# EAGLE board SparkFun_SOIC8-DIP-Adapter-Dimensions (EAGLE 7.3.0)
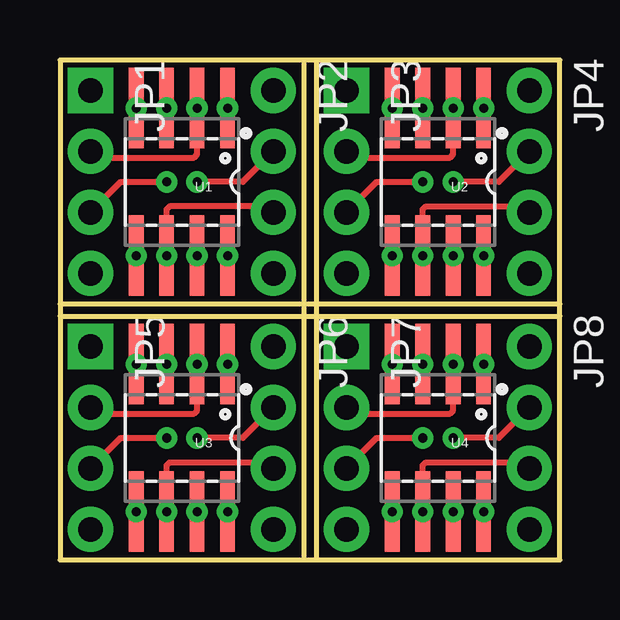
[diagram p0: board, top side]
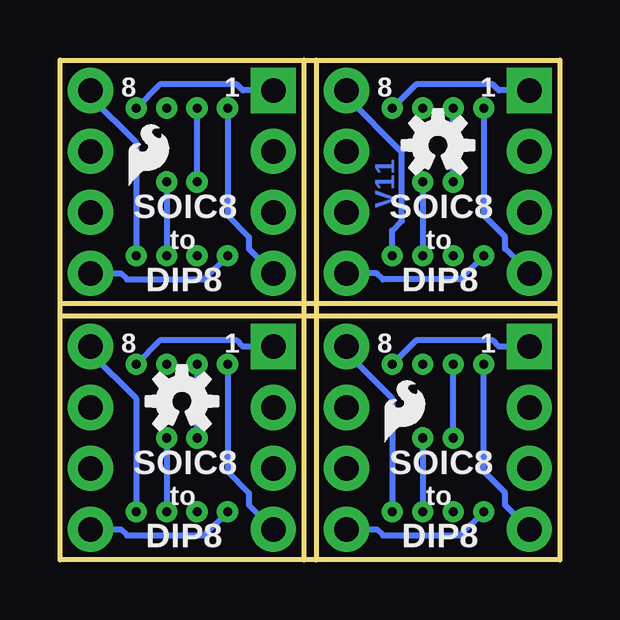
[diagram p1: board, bottom side, seen from below]

Size 20.83 x 20.83 mm. Coordinates in mm from the lower left corner, seen from the top.
Outline: 10.67,0 0,0 0,10.67
Outline: 20.83,10.67 20.83,0 10.67,0
Outline: 20.83,10.67 20.83,20.83 10.67,20.83
Outline: 10.67,20.83 0,20.83 0,10.67
Outline: 0,10.16 20.83,10.16
Outline: 10.16,20.83 10.16,0
Outline: 10.67,20.83 10.67,0
Outline: 0,10.67 20.83,10.67
Copper layers (1*16): Top 0.035mm / dielectric 1.5mm / Bottom 0.035mm
Design rules "SparkFun-2-layer *": minimum track width 7mil, minimum drill 15mil, track to track 8mil, track to pad 8mil, pad to pad 8mil, via to via 8mil, smd to smd 8mil, copper to edge 8mil, drill to drill 8mil, minimum pad ring 12mil, minimum via ring 10mil, stop-mask expansion 4mil, vias tented up to drill 20mil, thermal gap 10mil

## Footprints (pad centres in the part's own frame; a part is rotated, then mirrored left to right if it is on the bottom)
1X04_NO_SILK = drill 1.016 pad 1.88 square: 1 0,0 | drill 1.016 pad 1.88: 2 2.54,0; 3 5.08,0; 4 7.62,0
1X04_NO_SILK_ALL_ROUND = drill 1.016 pad 1.88: 1 0,0; 2 2.54,0; 3 5.08,0; 4 7.62,0
SO08-UNIVERSAL = smd 0.61 x 3.353: 1 -1.905,-3.073; 2 -0.635,-3.073; 3 0.635,-3.073; 4 1.905,-3.073; 5 1.905,3.073; 6 0.635,3.073; 7 -0.635,3.073; 8 -1.905,3.073

## Placement (x,y rotation side)
FRAME1  frame  [CREATIVE_COMMONS]  -15.24,-27.94 0 top  (outside the outline)
JP1  1x4  [1X04_NO_SILK]  1.27,19.56 270 top
JP2  1x4  [1X04_NO_SILK_ALL_ROUND]  8.89,19.56 270 top
JP3  1x4  [1X04_NO_SILK]  11.94,19.56 270 top
JP4  1x4  [1X04_NO_SILK_ALL_ROUND]  19.56,19.56 270 top
JP5  1x4  [1X04_NO_SILK]  1.27,8.89 270 top
JP6  1x4  [1X04_NO_SILK_ALL_ROUND]  8.89,8.89 270 top
JP7  1x4  [1X04_NO_SILK]  11.94,8.89 270 top
JP8  1x4  [1X04_NO_SILK_ALL_ROUND]  19.56,8.89 270 top
LOGO1  SFE_LOGO_FLAME.1_INCH  [SFE_LOGO_FLAME_.1]  18.29,15.24 0 bottom
LOGO2  OSHW-LOGOS  [OSHW-LOGO-S]  5.08,17.27 0 bottom
LOGO3  OSHW-LOGOS  [OSHW-LOGO-S]  15.75,6.6 0 bottom
LOGO4  SFE_LOGO_FLAME.1_INCH  [SFE_LOGO_FLAME_.1@1]  7.62,4.57 0 bottom
U1  GENERIC-SOIC8  [SO08-UNIVERSAL]  5.08,15.75 180 top
U2  GENERIC-SOIC8  [SO08-UNIVERSAL]  15.75,15.75 180 top
U3  GENERIC-SOIC8  [SO08-UNIVERSAL]  5.08,5.08 180 top
U4  GENERIC-SOIC8  [SO08-UNIVERSAL]  15.75,5.08 180 top

## Library data of the parts
FRAME1 LOGO1-LOGO4 = SparkFun-Aesthetics
JP1-JP8 = SparkFun-Connectors
U1-U4 = SparkFun-AnalogIC

## Nets
N$1: JP1.1 U1.1
N$2: JP1.2 U1.2
N$3: JP1.3 U1.3
N$4: JP1.4 U1.4
N$5: JP2.1 U1.8
N$6: JP2.2 U1.7
N$7: JP2.3 U1.6
N$8: JP2.4 U1.5
N$9: JP3.1 U2.1
N$10: JP3.2 U2.2
N$11: JP3.3 U2.3
N$12: JP3.4 U2.4
N$13: JP4.1 U2.8
N$14: JP4.2 U2.7
N$15: JP4.3 U2.6
N$16: JP4.4 U2.5
N$17: JP5.1 U3.1
N$18: JP5.2 U3.2
N$19: JP5.3 U3.3
N$20: JP5.4 U3.4
N$21: JP6.4 U3.5
N$22: JP6.3 U3.6
N$23: JP6.2 U3.7
N$24: JP6.1 U3.8
N$25: JP7.1 U4.1
N$26: JP7.2 U4.2
N$27: JP7.3 U4.3
N$28: JP7.4 U4.4
N$29: JP8.1 U4.8
N$30: JP8.2 U4.7
N$31: JP8.3 U4.6
N$32: JP8.4 U4.5

## Tracks (layer width: path | path; a pad name or v marks a point on that pad's centre or on a via)
N$1  (via drill 0.38)
  Bottom 0.254: U1.1 5.99,19.81 2.79,19.81 2.54,19.56 JP1.1
  other vias: 6.99,18.82
N$2  (via drill 0.38)
  Top 0.254: JP1.2 1.52,16.76 5.59,16.76 5.71,16.89 U1.2
  other vias: 5.71,18.82
N$3  (via drill 0.38)
  Top 0.254: JP1.3 2.54,15.75 v4.45,15.75
  Bottom 0.254: v4.45,15.75 U1.3
  other vias: 4.45,18.82
N$4  (via drill 0.38)
  Bottom 0.254: JP1.4 2.29,12.95 2.29,13.46 3.17,14.35 U1.4
  other vias: 3.17,18.82
N$5  (via drill 0.38)
  Top 0.254: U1.8 6.99,12.06 7.11,11.94
  Bottom 0.254: JP2.1 8.89,19.3 6.58,16.99 6.58,14.12 6.99,13.72 U1.8
  other vias: 6.99,12.67
N$6  (via drill 0.38)
  Top 0.254: v5.71,15.75 7.62,15.75 JP2.2
  Bottom 0.254: v5.71,15.75 U1.7
  other vias: 5.71,12.67
N$7  (via drill 0.38)
  Top 0.254: U1.6 4.45,14.61 4.57,14.73 8.64,14.73 JP2.3
  other vias: 4.45,12.67
N$8  (via drill 0.38)
  Bottom 0.254: JP2.4 7.62,11.94 7.37,11.68 4.17,11.68 U1.5
  other vias: 3.17,12.67
N$9  (via drill 0.38)
  Bottom 0.254: JP3.1 13.21,19.56 13.46,19.81 16.66,19.81 U2.1
  other vias: 17.65,18.82
N$10  (via drill 0.38)
  Top 0.254: JP3.2 12.19,16.76 16.26,16.76 16.38,16.89 U2.2
  other vias: 16.38,18.82
N$11  (via drill 0.38)
  Top 0.254: JP3.3 13.21,15.75 v15.11,15.75
  Bottom 0.254: v15.11,15.75 U2.3
  other vias: 15.11,18.82
N$12  (via drill 0.38)
  Bottom 0.254: U2.4 13.84,14.35 12.95,13.46 12.95,12.95 JP3.4
  other vias: 13.84,18.82
N$13  (via drill 0.38)
  Bottom 0.254: JP4.1 19.56,19.3 17.65,17.4 U2.8
  other vias: 17.65,12.67
N$14  (via drill 0.38)
  Top 0.254: JP4.2 18.29,15.75 v16.38,15.75
  Bottom 0.254: v16.38,15.75 U2.7
  other vias: 16.38,12.67
N$15  (via drill 0.38)
  Top 0.254: U2.6 15.11,14.61 15.24,14.73 19.3,14.73 JP4.3
  other vias: 15.11,12.67
N$16  (via drill 0.38)
  Bottom 0.254: JP4.4 18.29,11.94 18.03,11.68 14.83,11.68 U2.5
  other vias: 13.84,12.67
N$17  (via drill 0.38)
  Bottom 0.254: JP5.1 2.54,8.89 2.79,9.14 5.99,9.14 U3.1
  other vias: 6.99,8.15
N$18  (via drill 0.38)
  Top 0.254: JP5.2 1.52,6.1 5.59,6.1 5.71,6.22 U3.2
  other vias: 5.71,8.15
N$19  (via drill 0.38)
  Top 0.254: JP5.3 2.54,5.08 v4.45,5.08
  Bottom 0.254: v4.45,5.08 U3.3
  other vias: 4.45,8.15
N$20  (via drill 0.38)
  Bottom 0.254: JP5.4 2.29,2.29 2.29,2.79 3.17,3.68 U3.4
  other vias: 3.17,8.15
N$21  (via drill 0.38)
  Bottom 0.254: JP6.4 7.62,1.27 7.37,1.02 4.17,1.02 U3.5
  other vias: 3.17,2.01
N$22  (via drill 0.38)
  Top 0.254: U3.6 4.45,3.94 4.57,4.06 8.64,4.06 JP6.3
  other vias: 4.45,2.01
N$23  (via drill 0.38)
  Top 0.254: JP6.2 7.62,5.08 v5.71,5.08
  Bottom 0.254: v5.71,5.08 U3.7
  other vias: 5.71,2.01
N$24  (via drill 0.38)
  Bottom 0.254: JP6.1 8.89,8.64 6.99,6.73 U3.8
  other vias: 6.99,2.01
N$25  (via drill 0.38)
  Bottom 0.254: JP7.1 13.21,8.89 13.46,9.14 16.66,9.14 U4.1
  other vias: 17.65,8.15
N$26  (via drill 0.38)
  Top 0.254: JP7.2 12.19,6.1 16.26,6.1 16.38,6.22 U4.2
  other vias: 16.38,8.15
N$27  (via drill 0.38)
  Top 0.254: JP7.3 13.21,5.08 v15.11,5.08
  Bottom 0.254: v15.11,5.08 U4.3
  other vias: 15.11,8.15
N$28  (via drill 0.38)
  Bottom 0.254: U4.4 13.84,3.68 12.95,2.79 12.95,2.29 JP7.4
  other vias: 13.84,8.15
N$29  (via drill 0.38)
  Bottom 0.254: JP8.1 19.56,8.64 17.65,6.73 U4.8
  other vias: 17.65,2.01
N$30  (via drill 0.38)
  Top 0.254: JP8.2 18.29,5.08 v16.38,5.08
  Bottom 0.254: v16.38,5.08 U4.7
  other vias: 16.38,2.01
N$31  (via drill 0.38)
  Top 0.254: U4.6 15.11,3.94 15.24,4.06 19.3,4.06 JP8.3
  other vias: 15.11,2.01
N$32  (via drill 0.38)
  Bottom 0.254: JP8.4 18.29,1.27 18.03,1.02 14.83,1.02 U4.5
  other vias: 13.84,2.01

## Text on the board
Bottom: V11
bPlace: 1 | 8 | 1 | 8 | SOIC8 | SOIC8 | to | to | DIP8 | DIP8 | 1 | 8 | 1 | 8 | SOIC8 | SOIC8 | to | to | DIP8 | DIP8
Measures: All Units in Inches
tDocu: Byron Jacquot